# EAGLE board cryptoshield (EAGLE 7.2.0)
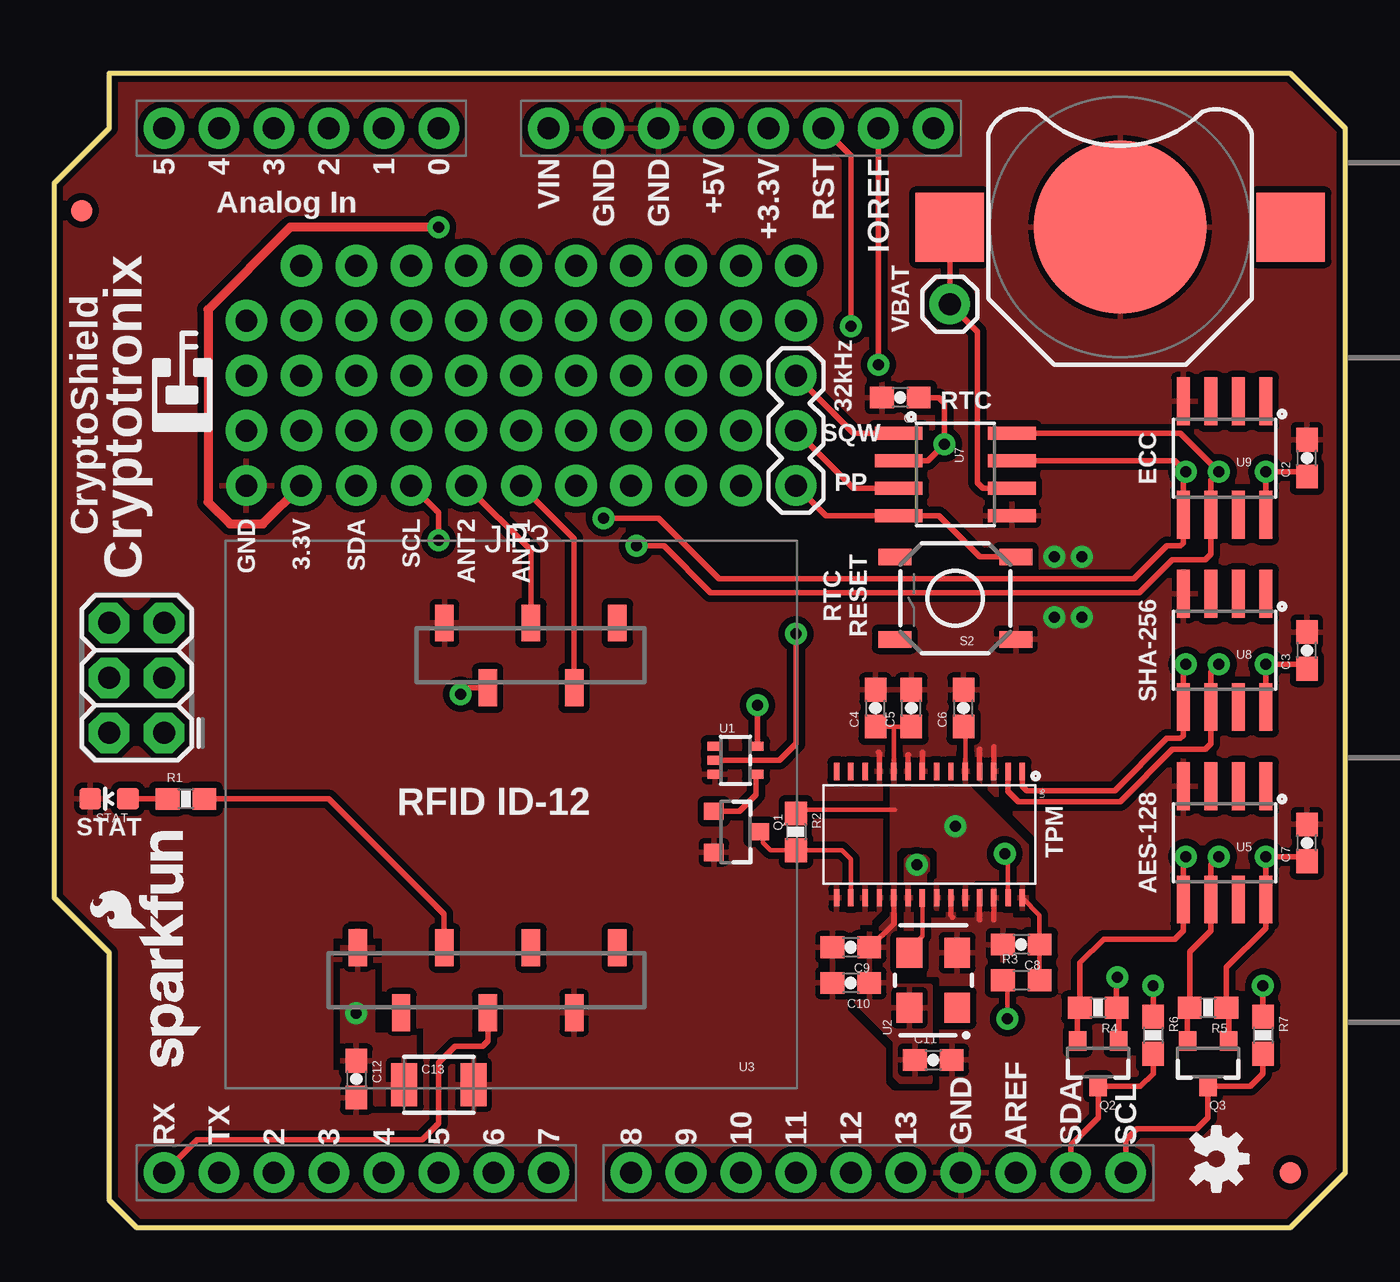
[diagram p0: board, top side]
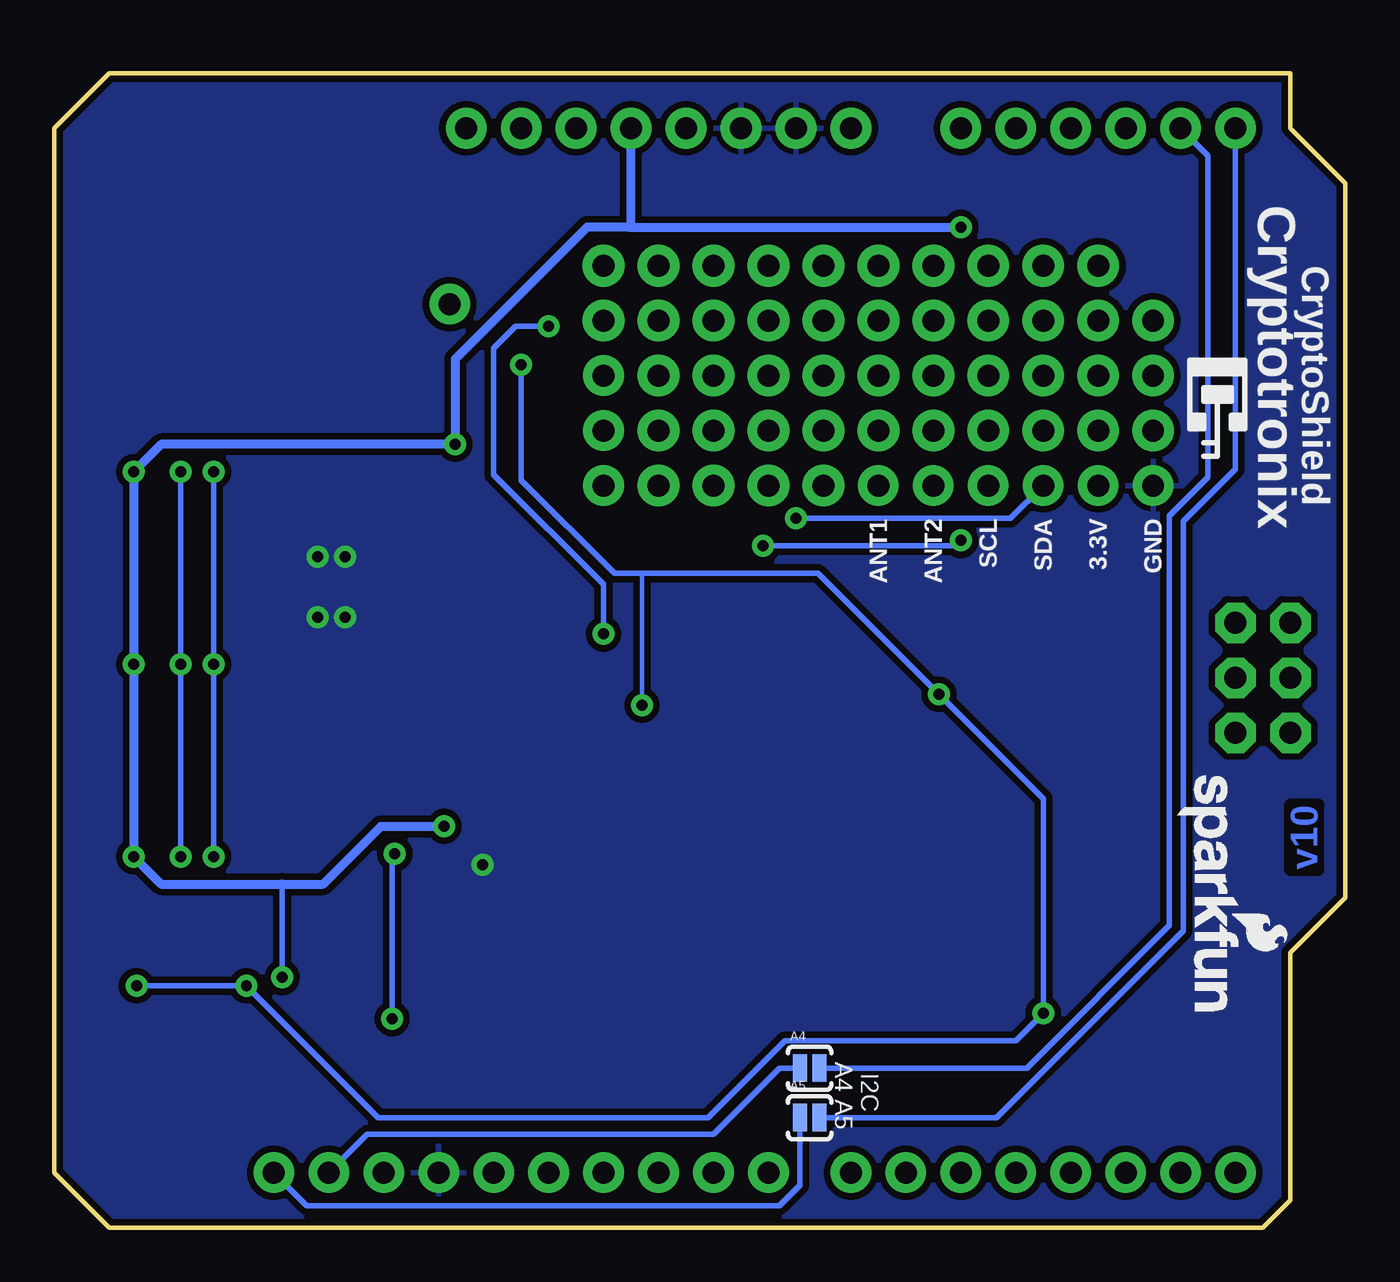
[diagram p1: board, bottom side, seen from below]

Size 59.69 x 53.34 mm. Coordinates in mm from the lower left corner, seen from the top.
Outline: 3.81,0 57.15,0 59.69,2.54 59.69,50.8 57.15,53.34 2.54,53.34 2.54,50.8 0,48.26 0,15.24 2.54,12.7 2.54,1.27 3.81,0
Copper layers (1*16): Top 0.035mm / dielectric 1.5mm / Bottom 0.035mm
Design rules "SparkFun-2-layer": minimum track width 7mil, minimum drill 15mil, track to track 8mil, track to pad 8mil, pad to pad 8mil, via to via 8mil, smd to smd 8mil, copper to edge 8mil, drill to drill 8mil, minimum pad ring 12mil, minimum via ring 10mil, stop-mask expansion 4mil, vias tented up to drill 20mil, thermal gap 10mil
tRestrict: 4 lines

## Footprints (pad centres in the part's own frame; a part is rotated, then mirrored left to right if it is on the bottom)
PAD-JUMPER-2-NO_YES_SILK = smd 0.635 x 1.27: 1 -0.45,0; 2 0.45,0
BATTCON_12MM = smd 8 x 8: GND 0,0 | smd 3.175 x 3.175: PWR@1 -7.874,0; PWR@2 7.874,0
0603-CAP = smd 1.1 x 1: 1 -0.85,0; 2 0.85,0
1210 = smd 1.2 x 2: 1 -1.6,0; 2 1.6,0
FIDUCIAL-1X2 = smd 1 x 1: 1 0,0
2X3 = drill 1.016 pad 1.88 octagon: 1 0,0; 2 0,2.54; 3 2.54,0; 4 2.54,2.54; 5 5.08,0; 6 5.08,2.54
1X01 = drill 1.016 pad 1.88: 1 0,0
1X03 = drill 1.016 pad 1.88: 1 0,0; 2 2.54,0; 3 5.08,0
1X06_NO_SILK = drill 1.016 pad 1.88: 1 0,0; 2 2.54,0; 3 5.08,0; 4 7.62,0; 5 10.16,0; 6 12.7,0
SOT23-3 = smd 0.8 x 0.9: 1 -0.95,-1; 2 0.95,-1; 3 0,1.1
0603-RES = smd 1.1 x 1: 1 -0.85,0; 2 0.85,0
0603 = smd 1.1 x 1: 1 -0.85,0; 2 0.85,0
TACTILE-SWITCH-SMD = smd 1.524 x 0.762: 1 -2.794,1.905; 2 2.794,1.905; 3 -2.794,-1.905; 4 2.794,-1.905
LED-0603 = smd 1 x 1: A 0,-0.877; C 0,0.877
SOT353 = smd 0.42 x 0.7: 1 -0.65,-0.95; 2 0,-0.95; 3 0.65,-0.95; 4 0.65,0.95; 5 -0.65,0.95
CRYSTAL-OSC-SMD-5X3.2 = smd 1.397 x 1.194: 1 -1.27,-1.1; 2 1.27,-1.1; 3 1.27,1.1; 4 -1.27,1.1
ID-12_SMD = smd 0.85 x 1.7: 1 16.248,3.81; 2 14.248,6.81; 3 12.248,3.81; 4 10.248,6.81; 5 8.248,3.81; 6 8.248,18.822; 7 10.248,21.822; 8 12.248,18.822; 9 14.248,21.822; 10 16.248,18.822; 11 20.248,18.822; NC 18.248,21.822
UNO_R3_SHIELD = drill 1.016 pad 1.88: 3.3V 50.8,26.67; 5V 50.8,29.21; A0 50.8,41.91; A1 50.8,44.45; A2 50.8,46.99; A3 50.8,49.53; A4 50.8,52.07; A5 50.8,54.61; AREF 2.54,15.24; D2 2.54,49.53; D3 2.54,46.99; D4 2.54,44.45; D5 2.54,41.91; D6 2.54,39.37; D7 2.54,36.83; D8 2.54,33.02; D9 2.54,30.48; D10 2.54,27.94; D11 2.54,25.4; D12 2.54,22.86; D13 2.54,20.32; GND@0 50.8,31.75; GND@1 50.8,34.29; GND@2 2.54,17.78; IOREF 50.8,21.59; NC 50.8,19.05; RES 50.8,24.13; RX 2.54,54.61; SCL 2.54,10.16; SDA 2.54,12.7; TX 2.54,52.07; VIN 50.8,36.83
SOIC8 = smd 0.61 x 2.21: 1 -1.905,-2.616; 2 -0.635,-2.616; 3 0.635,-2.616; 4 1.905,-2.616; 5 1.905,2.616; 6 0.635,2.616; 7 -0.635,2.616; 8 -1.905,2.616
TSSOP28 = smd 0.8 x 0.25: 1 -2.921,4.623; 2 -2.921,3.962; 3 -2.921,3.302; 4 -2.921,2.642; 5 -2.921,1.981; 6 -2.921,1.321; 7 -2.921,0.66; 8 -2.927,0; 9 -2.921,-0.66; 10 -2.921,-1.321; 11 -2.921,-1.981; 12 -2.921,-2.642; 13 -2.921,-3.302; 14 -2.921,-3.962; 15 2.921,-3.962; 16 2.921,-3.302; 17 2.921,-2.642; 18 2.921,-1.981; 19 2.921,-1.321; 20 2.921,-0.66; 21 2.927,0; 22 2.921,0.66; 23 2.921,1.321; 24 2.921,1.981; 25 2.921,2.642; 26 2.921,3.302; 27 2.921,3.962; 28 2.921,4.623

## Placement (x,y rotation side)
A4  [PAD-JUMPER-2-NO_YES_SILK]  24.77,7.37 0 bottom
A5  [PAD-JUMPER-2-NO_YES_SILK]  24.77,5.08 0 bottom
BAT1  3V  [BATTCON_12MM]  49.28,46.23 0 top
C1  0.1uF  [0603-CAP]  39.12,38.35 180 top
C2  0.1uF  [0603-CAP]  57.91,35.56 90 top
C3  0.1uF  [0603-CAP]  57.91,26.67 90 top
C4  .1uf  [0603-CAP]  37.97,24 90 top
C5  2200pf  [0603-CAP]  39.62,24 90 top
C6  2200pf  [0603-CAP]  42.04,24 90 top
C7  0.1uF  [0603-CAP]  57.91,17.78 90 top
C8  2200pf  [0603-CAP]  44.7,13.08 180 top
C9  2200pf  [0603-CAP]  36.83,12.95 180 top
C10  .1uf  [0603-CAP]  36.83,11.3 180 top
C11  .1uf  [0603-CAP]  40.64,7.75 0 top
C12  0.1uF  [0603-CAP]  13.97,6.86 270 top
C13  10uF  [1210]  17.78,6.6 0 top
FID1  FIDUCIAL1X2  [FIDUCIAL-1X2]  1.27,46.99 0 top
FID2  FIDUCIAL1X2  [FIDUCIAL-1X2]  57.15,2.54 0 top
FRAME2  [CREATIVE_COMMONS]  0,-12.7 0 top  (outside the outline)
J1  AVR_SPI_PRG_6PTH  [2X3]  5.08,22.86 90 top
JP1  M01PTH  [1X01]  41.4,42.67 0 top
JP2  [1X03]  34.29,39.37 270 top
JP3  [1X06_NO_SILK]  21.59,34.29 180 top
LOGO2  OSHW-LOGOS  [OSHW-LOGO-S]  53.72,3.17 270 top
LOGO3  SFE_LOGO_NAME_FLAME.1_INCH  [SFE_LOGO_NAME_FLAME_.1]  6.86,6.99 90 top
Q1  BSS138  [SOT23-3]  31.5,18.29 270 top
Q2  BSS138  [SOT23-3]  48.26,7.62 180 top
Q3  BSS138  [SOT23-3]  53.34,7.62 180 top
R1  1k  [0603-RES]  6.1,19.81 0 top
R2  10K  [0603-RES]  34.29,18.29 270 top
R3  4.7K  [0603]  44.7,11.43 0 top
R4  10K  [0603-RES]  48.26,10.16 180 top
R5  10K  [0603-RES]  53.34,10.16 180 top
R6  10K  [0603-RES]  50.8,8.89 270 top
R7  10K  [0603-RES]  55.88,8.89 270 top
S2  Reset  [TACTILE-SWITCH-SMD]  41.66,29.08 180 top
STAT  GREEN  [LED-0603]  2.54,19.81 90 top
U1  74LVC1G04  [SOT353]  31.5,21.59 270 top
U2  33mhz  [CRYSTAL-OSC-SMD-5X3.2]  40.64,11.43 90 top
U3  ID-12/20SMD  [ID-12_SMD]  34.29,31.75 180 top
U4  ARDUINO_R3_SHIELD  [UNO_R3_SHIELD]  59.69,0 90 top
U5  ATAES132  [SOIC8]  54.1,17.78 180 top
U6  AT97SC3204T  [TSSOP28]  40.13,18.16 270 top
U7  DS3231M  [SOIC8]  41.66,34.8 270 top
U8  ATSHA204_SOIC8  [SOIC8]  54.1,26.67 180 top
U9  ATECC108  [SOIC8]  54.1,35.56 180 top
U$3  [OSHW-LOGO-S]  53.72,3.17 270 top
U$101  [SFE_LOGO_NAME_FLAME_.1]  7.87,21.34 270 bottom

## Library data of the parts
A4 A5 = SparkFun-Passives
BAT1 = SparkFun-Electromechanical; PROD_ID: BATT-08044
C1-C3 C7 C11 C12 = SparkFun-Capacitors; PROD_ID: CAP-00810
C4 C10 = SparkFun-Capacitors; PROD_ID: CAP-00810; VALUE: 0.1uF
C5 C6 C8 C9 = SparkFun-Capacitors; PROD_ID: CAP-07877; VALUE: 2.2nF
C13 = SparkFun-Capacitors; PROD_ID: CAP-09824
FID1 FID2 LOGO2 LOGO3 U$3 U$101 = SparkFun-Aesthetics
FRAME2 = SparkFun-Aesthetics; DESIGNER: Josh Datko / Casey Kuhns; VERSION: v10
J1 JP1 JP2 = SparkFun-Connectors
JP3 = SparkFun-Connectors; PROD_ID: CONN-08437
Q1-Q3 = SparkFun-DiscreteSemi; PROD_ID: TRANS-00830; VALUE: 200mA/50V
R1 = SparkFun-Resistors; PROD_ID: RES-07856
R2 R4-R7 = SparkFun-Resistors; PROD_ID: RES-00824
R3 = SparkFun-Resistors; PROD_ID: RES-07857
S2 = SparkFun-Electromechanical; PROD_ID: SWCH-08247
STAT = SparkFun-LED; PROD_ID: DIO-00821
U1 = SparkFun-DigitalIC; PROD_ID: 10843
U2 = SparkFun-FreqCtrl; PROD_ID: XTAL-11986
U3 = SparkFun-RF
U4 = SparkFun-Boards
U5 = SparkFun-DigitalIC; PROD_ID: IC-11983
U6 = SparkFun-DigitalIC; PROD_ID: IC-11984
U7 = SparkFun-DigitalIC; PROD_ID: IC-11985
U8 = SparkFun-DigitalIC; PROD_ID: IC-11981
U9 = SparkFun-DigitalIC; PROD_ID: IC-11982

## Nets
3.3V: C1.1 C2.1 C3.1 C4.1 C5.1 C6.1 C7.1 C8.1 C9.1 C10.1 C11.1 JP3.5 Q2.1 Q3.1 R2.1 R3.2 R4.1 R5.1 U2.4 U4.3.3V U5.8 U6.5 U6.10 U6.19 U6.22 U6.24 U6.28 U7.2 U8.8 U9.8
32KHZ: JP2.1 U7.1
!RESET: U1.2 U4.RES
ANT1: JP3.2 U3.3
ANT2: JP3.1 U3.4
GND: BAT1.GND C1.2 C2.2 C3.2 C4.2 C5.2 C6.2 C7.2 C8.2 C9.2 C10.2 C11.2 C12.2 C13.2 JP3.6 Q1.2 S2.1 STAT.C U1.3 U2.2 U3.1 U3.7 U4.GND@0 U4.GND@1 U4.GND@2 U5.4 U6.3 U6.4 U6.8 U6.9 U6.11 U6.15 U6.17 U6.18 U6.20 U6.23 U6.25 U6.26 U7.5 U8.4 U9.4
N$1: R1.2 U3.10
N$4: A4.2 U4.A4
N$6: A5.2 U4.A5
N$12: R1.1 STAT.A
N$18: Q1.3 R2.2 U6.16
N$19: R3.1 U6.27
N$20: Q1.1 U1.4
PP: JP2.3 S2.3 U7.4
RX: U3.9 U4.RX
SCL: JP3.3 Q3.2 R5.2 U5.6 U6.2 U7.8 U8.6 U9.6
SCL_IN: A5.1 Q3.3 R7.2 U4.SCL
SDA: JP3.4 Q2.2 R4.2 U5.5 U6.1 U7.7 U8.5 U9.5
SDA_IN: A4.1 Q2.3 R6.2 U4.SDA
SQW: JP2.2 U7.3
TPM_CLK: U2.3 U6.21
VBAT: BAT1.PWR@1 JP1.1 U7.6
VCCIO: C12.1 C13.1 R6.1 R7.1 U1.5 U3.2 U3.11 U4.IOREF

## Tracks (layer width: path | path; a pad name or v marks a point on that pad's centre or on a via)
3.3V  (via drill 0.51)
  Top 0.203: R3.2 C8.1 45.55,14.44 U6.28 | C4.1 38.81,23.15 | 38.81,23.15 C5.1 | U6.5 42.11,22.82 | R2.1 34.46,19.3 38.86,19.3 | U6.10 38.81,23.15
  Top 0.254: Q3.1 54.29,10.06 R5.1 54.19,12.03 56.01,13.84 56.01,14.35 55.88,14.48 55.88,15.04 U5.8 v56.01,17.14 57.7,17.14 C7.1 | Q2.1 49.21,10.06 R4.1 49.11,11.52 v49.15,11.56 | C2.1 57.91,34.92 v56.01,34.92 U9.8 | C3.1 57.91,26.04 v56.01,26.04 U8.8 | U7.2 40.39,35.43 v41.15,36.2 41.15,38.1 40.89,38.35 C1.1 | C9.1 37.72,12.95 38.81,14.05 U6.19 | 42.11,22.82 42.04,22.9 C6.1
  Top 0.406: v17.78,46.23 10.92,46.23 7.11,42.42 7.11,33.53 8.13,32.51 9.65,32.51 JP3.5
  Bottom 0.254: v49.15,11.56 49.15,15.88
  Bottom 0.406: 33.15,46.23 35.05,46.23 41.15,40.13 v41.15,36.2 54.74,36.2 v56.01,34.92 v56.01,26.04 v56.01,17.14 54.74,15.88 49.15,15.88 47.24,15.88 44.58,18.54 v41.66,18.54 | U4.3.3V 33.02,46.35 33.15,46.23 | 33.15,46.23 v17.78,46.23
  pour Top (isolate 0.305): 42.29,21.59 42.04,21.59 42.04,20.32 38.86,20.32 38.86,21.59 38.73,21.59 38.73,14.35 37.97,13.59 37.08,13.59 37.08,10.41 38.86,8.64 38.86,6.99 39.12,6.73 40.51,6.73 40.51,11.18 38.86,11.18 38.86,17.4 39.12,17.65 40.64,17.65 40.89,17.4 40.89,16.13 40.77,16 40.77,14.73 40.89,14.73 40.89,16 42.04,16 42.04,14.73 42.29,14.73 42.29,15.88 42.55,16.13 44.32,16.13 44.58,15.88 44.58,14.73 44.96,14.73 44.96,17.65 42.29,20.32
32KHZ
  Top 0.254: JP2.1 36.96,36.7 U7.1
!RESET  (via drill 0.51)
  Top 0.254: U4.RES 36.83,49.53 v36.83,41.66 | v34.29,27.43 34.29,22.35 33.53,21.59 U1.2
  Bottom 0.254: v36.83,41.66 38.35,41.66 39.37,40.64 39.37,34.8 34.29,29.72 v34.29,27.43
ANT1
  Top 0.254: U3.3 22.04,31.3 JP3.2
ANT2
  Top 0.254: U3.4 24.04,31.84 JP3.1
GND  (via drill 0.51)
  Top 0.203: U6.8
  Top 0.254: U6.23 41.45,14.43 41.53,14.35 | U6.25 42.77,14.25 42.8,14.22 | U6.26 43.43,14.22 | U6.8 40.13,21.97 | U6.9 39.47,21.82 39.5,21.84 | U6.11 38.15,21.92 38.1,21.97 | U6.4 42.77,22.07 42.8,22.1 | U6.3 43.43,22.23
  other vias: 39.88,16.76 46.23,28.19 46.23,30.99 47.5,30.99 47.5,28.19
  pour Bottom (isolate 0.305): 0,53.59 59.69,53.59 59.69,0 0,0
  pour Top (isolate 0.305, rank 6): 0,53.59 59.69,53.59 59.69,0 0,0
N$1
  Top 0.254: R1.2 12.7,19.81 18.03,14.48 U3.10
N$4
  Bottom 0.254: A4.2 14.73,7.37 8.13,13.97 8.13,32.89 6.35,34.67 6.35,49.53 U4.A4
N$6
  Bottom 0.254: A5.2 16.13,5.08 7.49,13.72 7.49,32.64 5.08,35.05 U4.A5
N$12
  Top 0.254: STAT.A R1.1
N$18
  Top 0.203: U6.16 36.83,17.02 36.41,17.44 R2.2 33.11,17.44 32.77,17.78 32.77,18.12 Q1.3
N$19  (via drill 0.51)
  Top 0.203: U6.27 44.09,17.12 v43.94,17.27 | v44.07,9.65 44.07,11.21 R3.1
  Bottom 0.254: v44.07,9.65 44.07,17.14 v43.94,17.27
N$20
  Top 0.254: U1.4 32.45,20 31.68,19.24 Q1.1
N$83  (via drill 1.02 pad 1.93)
  other vias: 8.89,36.83
N$85  (via drill 1.02 pad 1.93)
  other vias: 11.43,36.83
N$86  (via drill 1.02 pad 1.93)
  other vias: 13.97,36.83
N$87  (via drill 1.02 pad 1.93)
  other vias: 16.51,36.83
N$88  (via drill 1.02 pad 1.93)
  other vias: 19.05,36.83
N$89  (via drill 1.02 pad 1.93)
  other vias: 21.59,36.83
N$90  (via drill 1.02 pad 1.93)
  other vias: 24.13,36.83
N$91  (via drill 1.02 pad 1.93)
  other vias: 24.13,34.29
N$92  (via drill 1.02 pad 1.93)
  other vias: 26.67,34.29
N$94  (via drill 1.02 pad 1.93)
  other vias: 29.21,34.29
N$95  (via drill 1.02 pad 1.93)
  other vias: 31.75,34.29
N$96  (via drill 1.02 pad 1.93)
  other vias: 31.75,36.83
N$97  (via drill 1.02 pad 1.93)
  other vias: 29.21,36.83
N$98  (via drill 1.02 pad 1.93)
  other vias: 26.67,36.83
N$99  (via drill 1.02 pad 1.93)
  other vias: 24.13,39.37
N$100  (via drill 1.02 pad 1.93)
  other vias: 26.67,39.37
N$101  (via drill 1.02 pad 1.93)
  other vias: 29.21,39.37
N$102  (via drill 1.02 pad 1.93)
  other vias: 31.75,39.37
N$103  (via drill 1.02 pad 1.93)
  other vias: 31.75,41.91
N$104  (via drill 1.02 pad 1.93)
  other vias: 29.21,41.91
N$105  (via drill 1.02 pad 1.93)
  other vias: 26.67,41.91
N$106  (via drill 1.02 pad 1.93)
  other vias: 24.13,41.91
N$107  (via drill 1.02 pad 1.93)
  other vias: 21.59,39.37
N$108  (via drill 1.02 pad 1.93)
  other vias: 21.59,41.91
N$109  (via drill 1.02 pad 1.93)
  other vias: 19.05,41.91
N$110  (via drill 1.02 pad 1.93)
  other vias: 19.05,39.37
N$111  (via drill 1.02 pad 1.93)
  other vias: 16.51,39.37
N$112  (via drill 1.02 pad 1.93)
  other vias: 16.51,41.91
N$113  (via drill 1.02 pad 1.93)
  other vias: 13.97,41.91
N$114  (via drill 1.02 pad 1.93)
  other vias: 13.97,39.37
N$115  (via drill 1.02 pad 1.93)
  other vias: 11.43,39.37
N$116  (via drill 1.02 pad 1.93)
  other vias: 11.43,41.91
N$117  (via drill 1.02 pad 1.93)
  other vias: 8.89,41.91
N$118  (via drill 1.02 pad 1.93)
  other vias: 8.89,39.37
N$130  (via drill 1.02 pad 1.93)
  other vias: 11.43,44.45
N$131  (via drill 1.02 pad 1.93)
  other vias: 13.97,44.45
N$132  (via drill 1.02 pad 1.93)
  other vias: 16.51,44.45
N$133  (via drill 1.02 pad 1.93)
  other vias: 19.05,44.45
N$134  (via drill 1.02 pad 1.93)
  other vias: 21.59,44.45
N$135  (via drill 1.02 pad 1.93)
  other vias: 24.13,44.45
N$136  (via drill 1.02 pad 1.93)
  other vias: 26.67,44.45
N$137  (via drill 1.02 pad 1.93)
  other vias: 29.21,44.45
N$138  (via drill 1.02 pad 1.93)
  other vias: 31.75,44.45
N$139  (via drill 1.02 pad 1.93)
  other vias: 34.29,41.91
N$140  (via drill 1.02 pad 1.93)
  other vias: 34.29,44.45
PP
  Top 0.254: U7.4 35.69,32.89 JP2.3 | 38.99,32.84 U7.4 | U7.4 40.89,32.89 42.8,30.99 S2.3 44.58,30.99
RX
  Top 0.254: U3.9 20.07,9.9 20.07,8.64 19.81,8.38 18.54,8.38 17.78,7.62 17.78,4.83 17.02,4.06 6.6,4.06 U4.RX
SCL  (via drill 0.51)
  Top 0.254: v53.85,17.14 53.47,16.76 U5.6 53.47,13.72 52.49,12.74 R5.2 52.39,10.06 Q3.2 | v53.85,26.04 53.47,25.65 U8.6 53.47,22.35 53.21,22.1 51.69,22.1 49.28,19.68 44.58,19.68 44.09,20.17 U6.2 | U7.8 52.07,36.7 v53.85,34.92 53.47,34.54 U9.6 53.47,31.11 53.21,30.86 51.69,30.86 50.16,29.34 30.35,29.34 28.19,31.5 v26.92,31.5 | v17.78,31.75 17.78,33.02 JP3.3
  Bottom 0.254: v53.85,17.14 v53.85,26.04 v53.85,34.92 | v26.92,31.5 18.03,31.5 v17.78,31.75
SCL_IN
  Top 0.254: R7.2 55.88,7.11 55.29,6.52 Q3.3 53.34,5.08 52.83,4.57 50.04,4.57 49.53,4.06 U4.SCL
  Bottom 0.254: A5.1 25.21,1.96 26.16,1.02 48.01,1.02 U4.SCL
SDA  (via drill 0.51)
  Top 0.254: v52.32,17.14 52.2,17.02 U5.5 52.2,13.72 51.82,13.34 48.51,13.34 47.41,12.23 R4.2 47.31,10.06 Q2.2 | v52.32,26.04 52.2,25.91 U8.5 52.2,22.73 52.07,22.61 51.44,22.61 49.02,20.19 44.96,20.19 44.76,20.4 U6.1 | U7.7 51.82,35.43 v52.32,34.92 52.2,34.8 U9.5 52.2,31.62 52.07,31.5 51.44,31.5 49.91,29.97 30.73,29.97 27.94,32.77 v25.4,32.77
  Bottom 0.254: v52.32,34.92 v52.32,26.04 v52.32,17.14 | v25.4,32.77 15.49,32.77 JP3.4
SDA_IN
  Top 0.254: R6.2 50.8,7.11 50.21,6.52 Q2.3 48.26,5.08 46.99,3.81 U4.SDA
  Bottom 0.254: A4.1 26.16,7.37 29.21,4.32 45.21,4.32 U4.SDA
SQW
  Top 0.254: U7.3 36.96,34.16 JP2.2
TPM_CLK
  Top 0.203: U2.3 39.54,12.87 40.13,13.46 U6.21
VBAT
  Top 0.254: U7.6 42.93,34.16 42.67,34.42 42.67,41.4 JP1.1 BAT1.PWR@1
VCCIO  (via drill 0.51)
  Top 0.254: R6.1 v50.8,11.18 | v55.88,11.18 R7.1 | U3.2 19.1,24.94 v18.8,24.64 | v38.1,39.88 U4.IOREF | U1.5 32.51,22.31 v32.51,24.13
  Bottom 0.203: v32.51,24.13 32.51,30.23
  Bottom 0.254: v55.88,11.18 v50.8,11.18 44.7,5.08 29.46,5.08 25.91,8.64 15.24,8.64 v13.97,9.91 13.97,19.81 v18.8,24.64 24.38,30.23 32.51,30.23 33.78,30.23 38.1,34.54 v38.1,39.88
  pour Top: 13.34,13.72 14.73,13.72 14.73,8.89 16.64,8.89 16.64,5.71 14.86,5.71 14.86,6.99 13.34,6.99

## Text on the board
Bottom: v10
tPlace: VBAT | 32kHz | RTC | SQW | ECC | PP | GND | 3.3V | SDA | SCL | ANT2 | ANT1 | CryptoShield | Cryptotronix | RTC / RESET | SHA-256 | STAT | RFID ID-12 | TPM | AES-128
bPlace: Cryptotronix | CryptoShield | GND | 3.3V | SDA | SCL | ANT2 | ANT1 | I2C / A4 A5